# Altium PCB PowerBoard.PcbDoc
Units mm, origin at the board's own origin, x right, y up, seen from the top; angles counter-clockwise.
Board outline 99.8 x 133.8 mm, 4 copper layers (Top Layer, Signal Layer 1, Signal Layer 2, Bottom Layer), stack 1.55 mm thick; 73 components, 18 nets, 363 pads, 774 vias.
Unrouted connection lines stored in the file: 2.
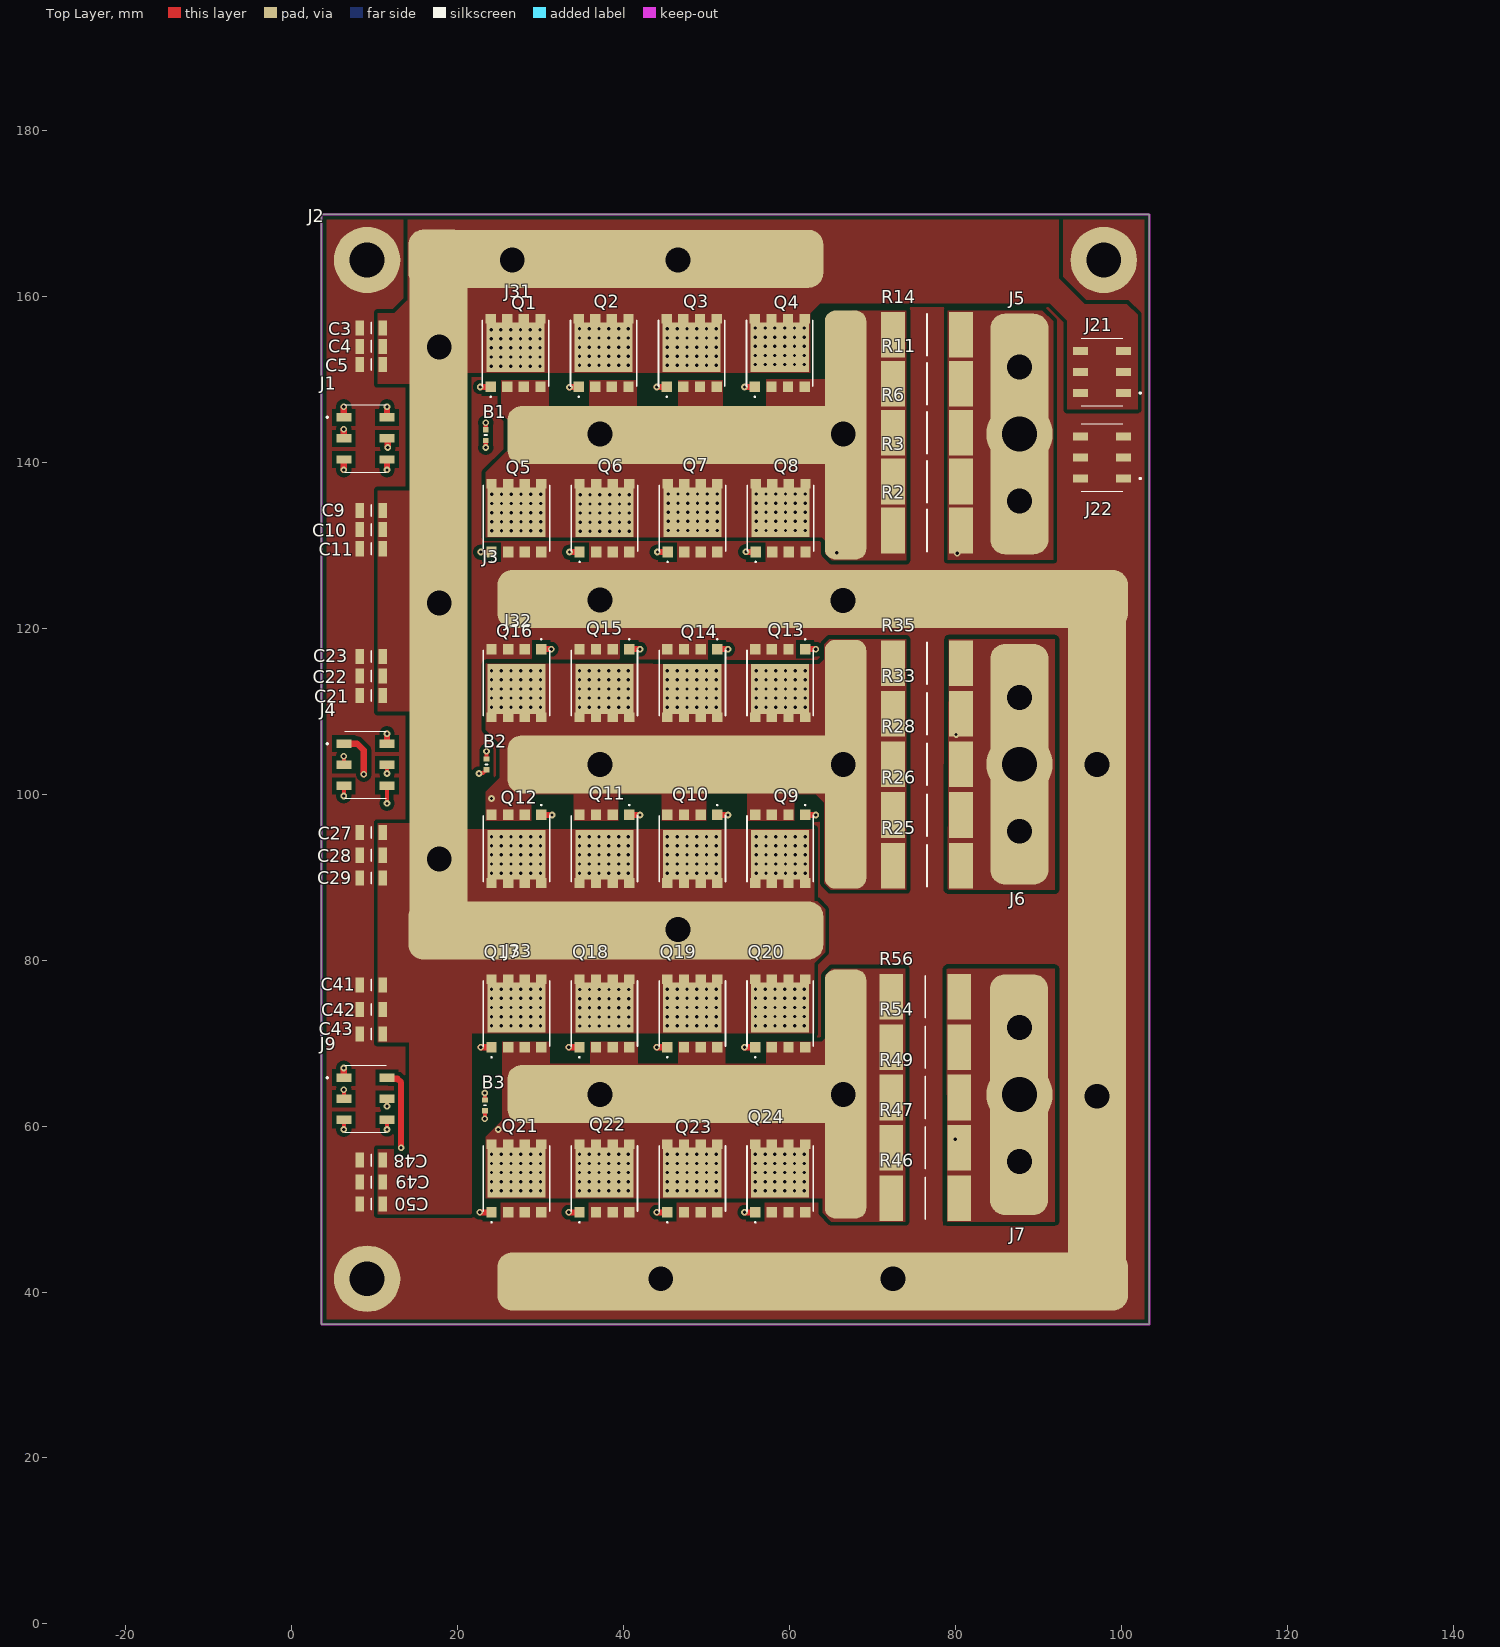
[diagram p0: Top Layer view]
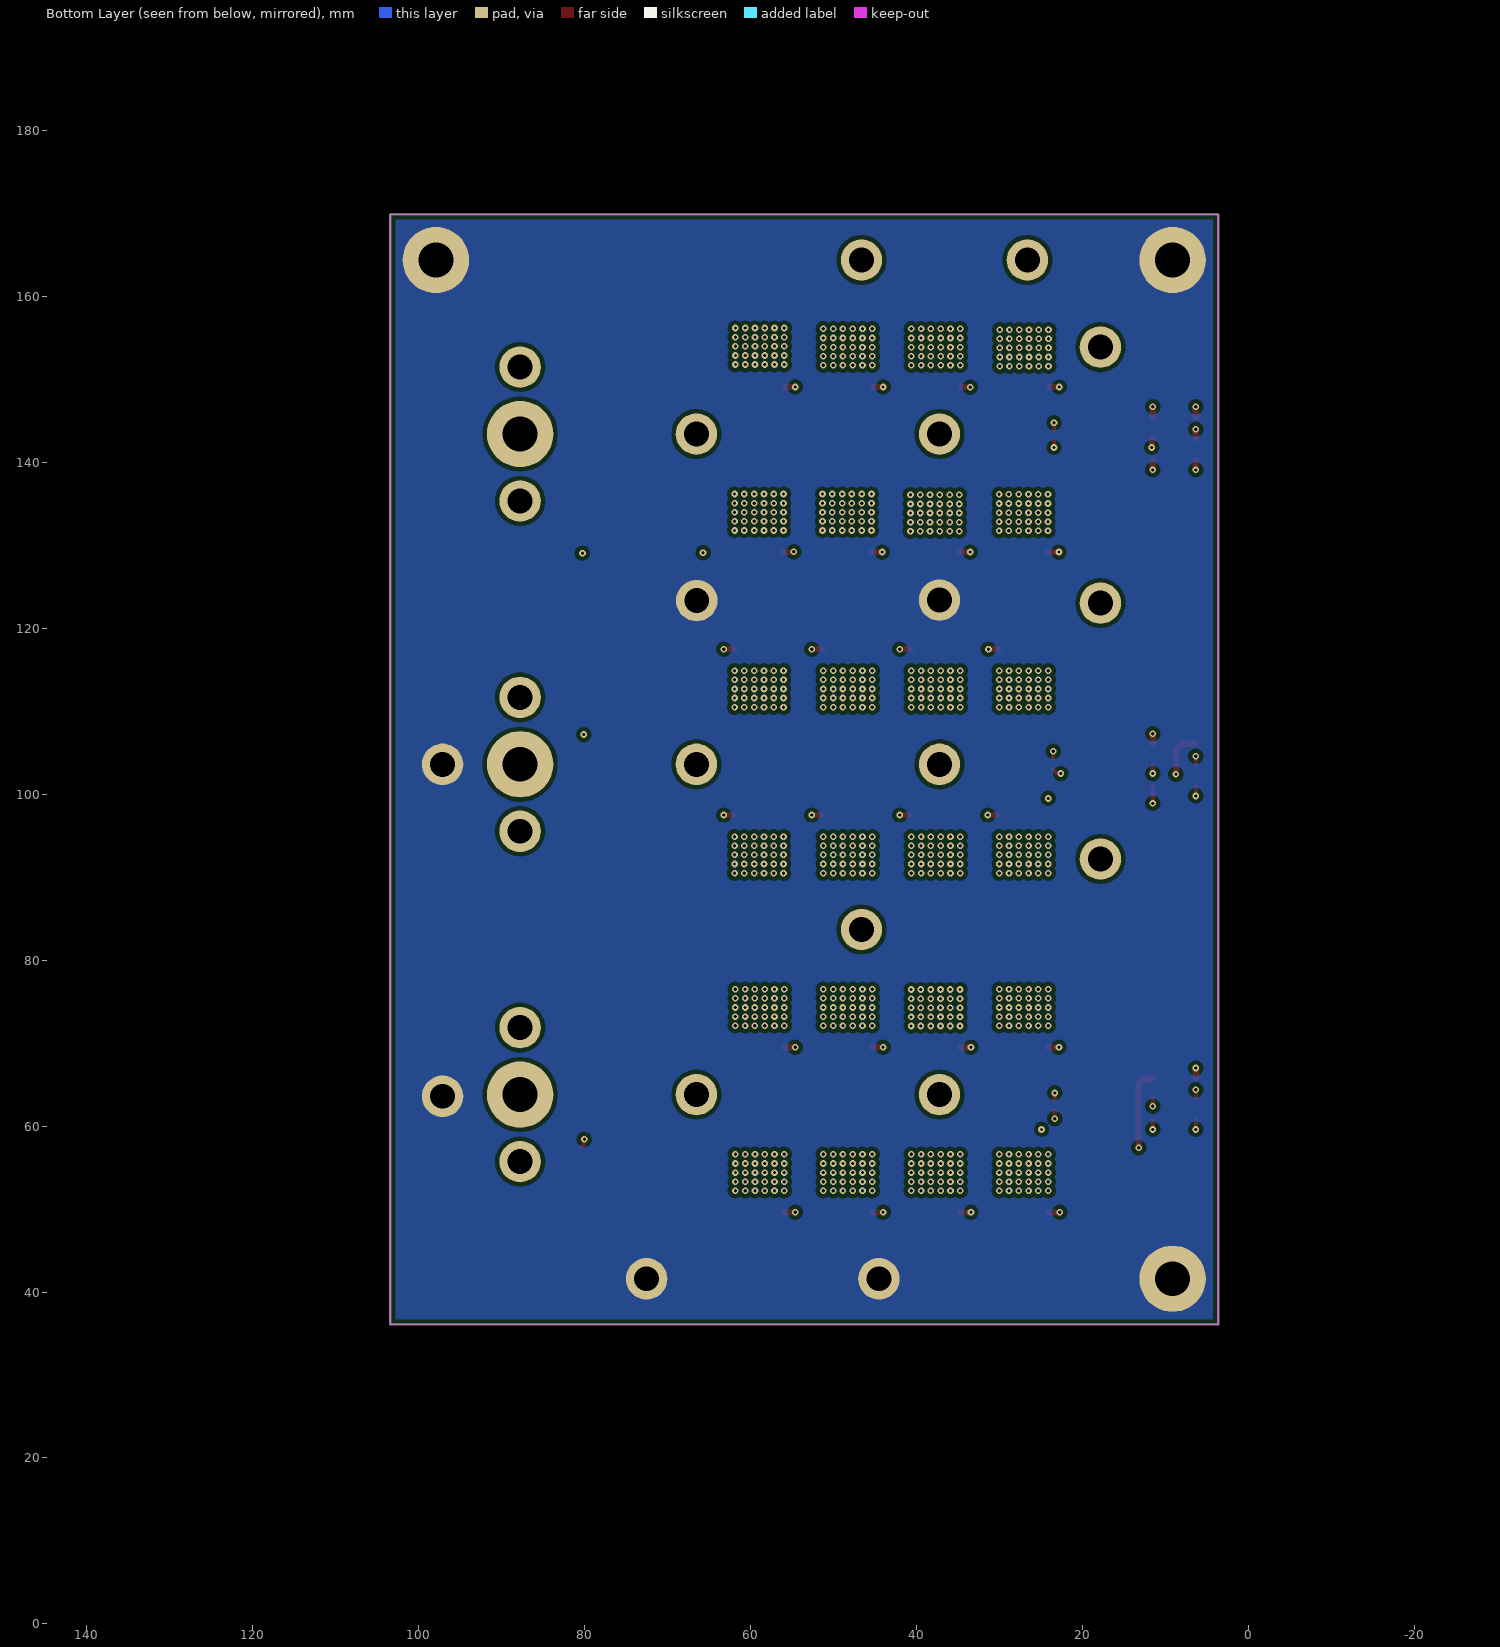
[diagram p1: Bottom Layer view, seen from below]
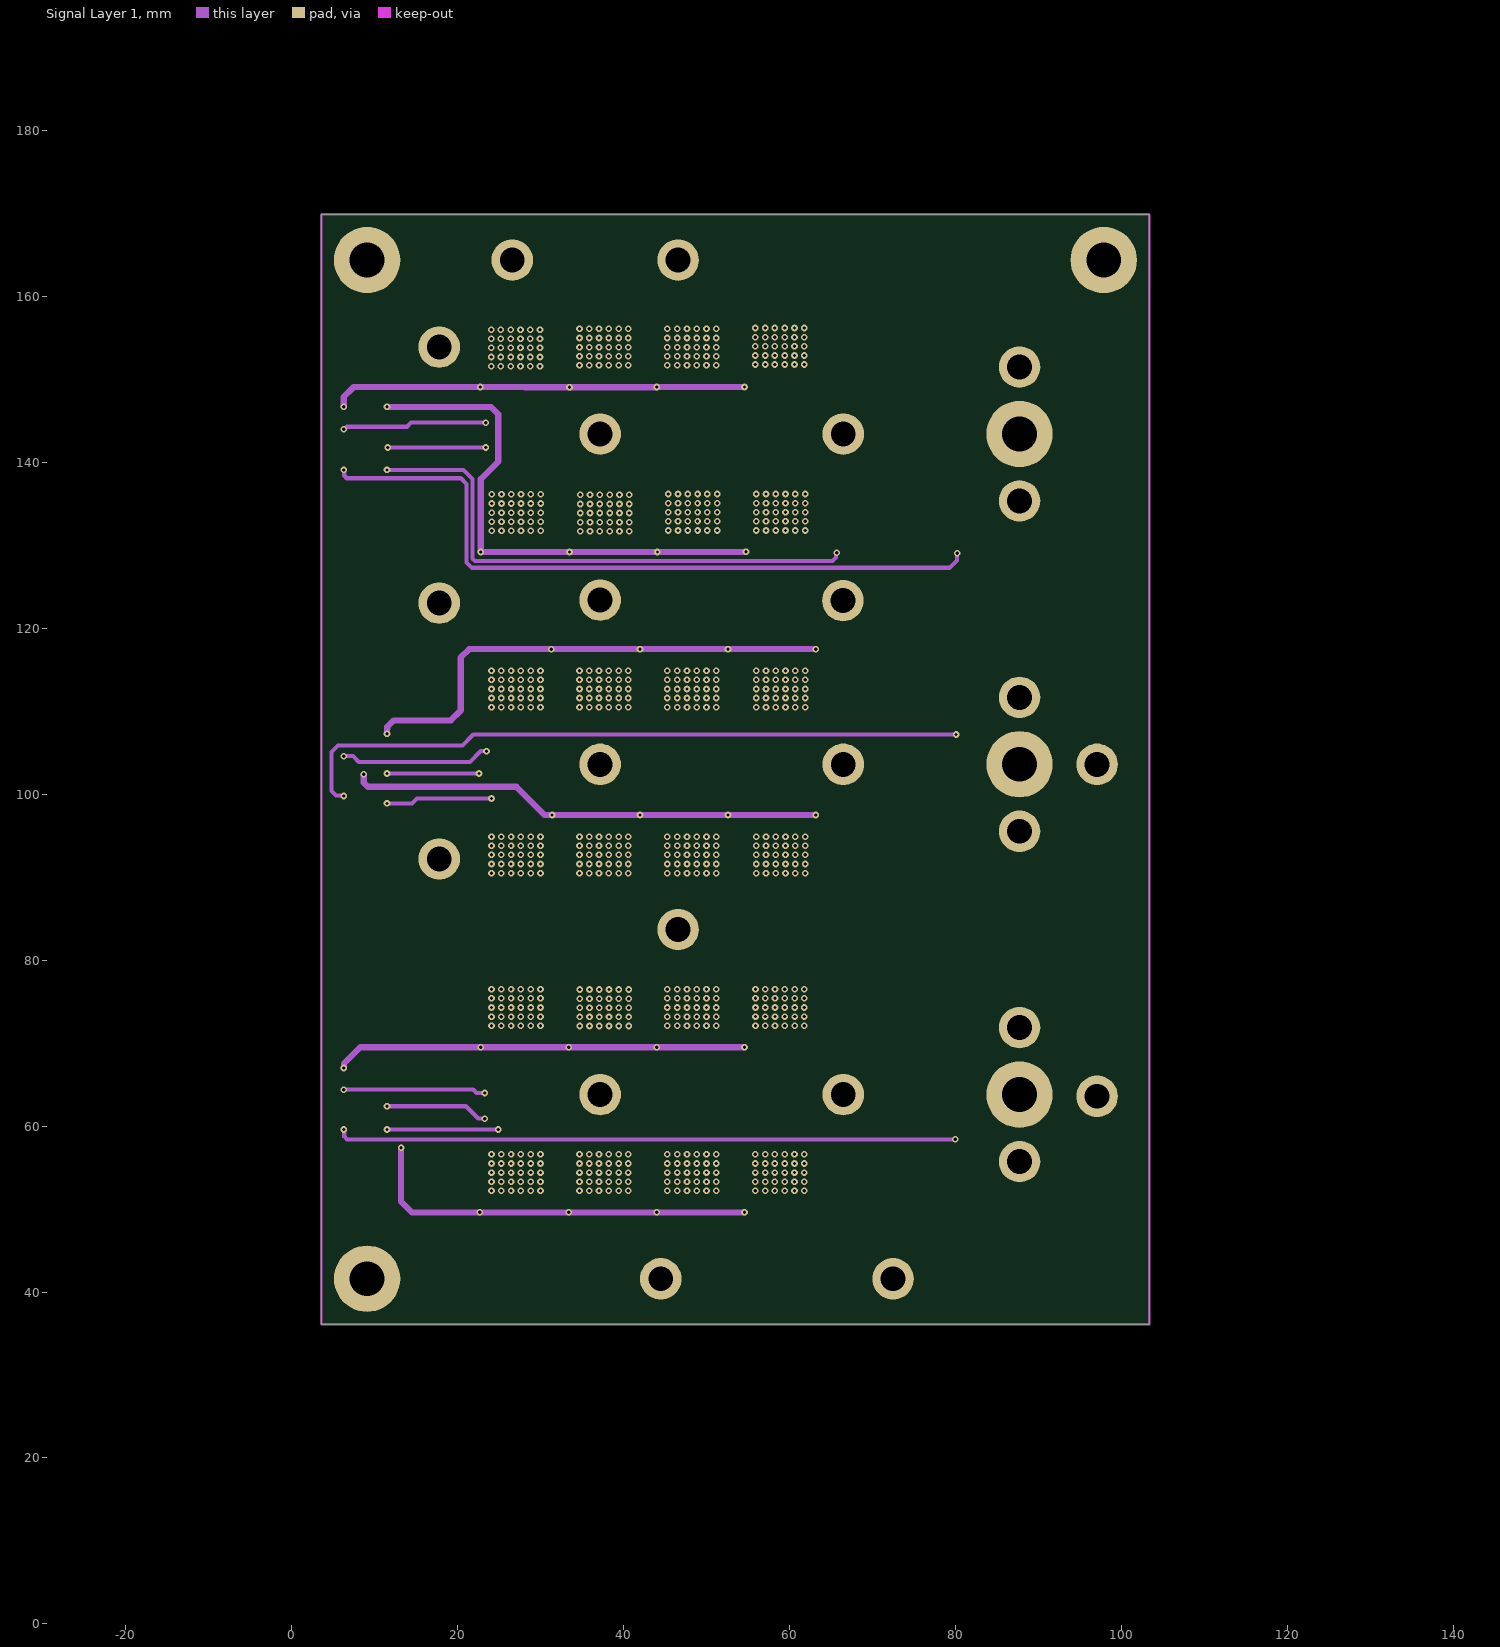
[diagram p2: Signal Layer 1]
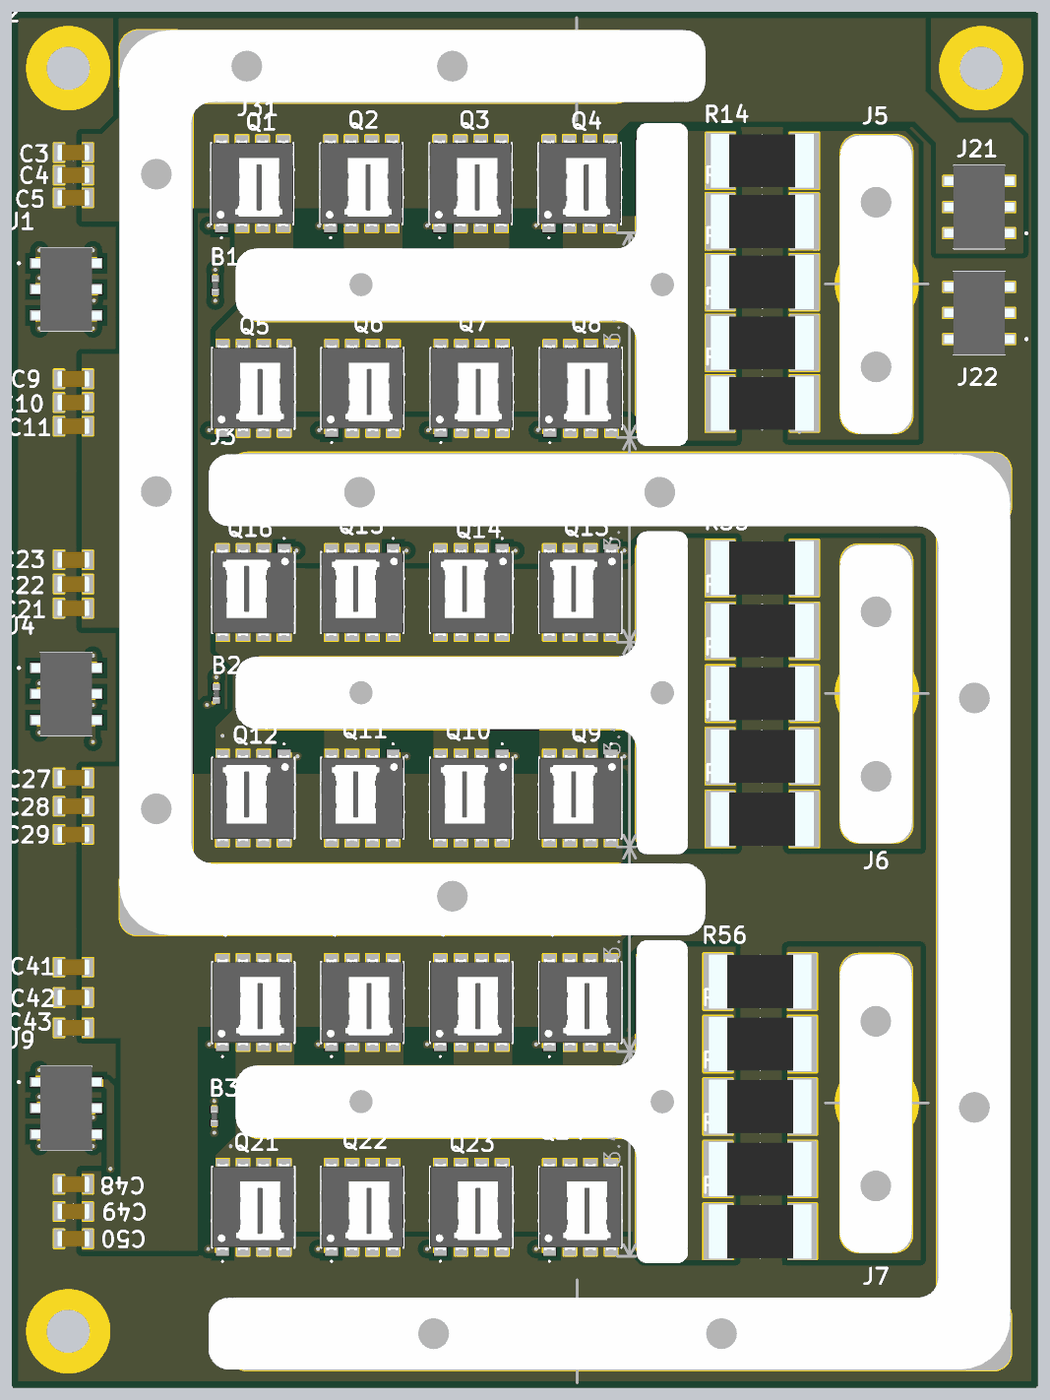
[diagram p3: 3D render of the assembled board from above, using the file's embedded part models]

## Layer stack, top to bottom
Top Solder: solder mask 0.025, Solder Resist, Dk 3.5
Top Layer: signal copper 0.018
Dielectric 2: core 0.254, Dk 4.2
Signal Layer 1: signal copper 0.036
Dielectric 4: core 0.934, Dk 4.2
Signal Layer 2: signal copper 0.036
Dielectric 3: core 0.254, Dk 4.2
Bottom Layer: signal copper 0.018
Bottom Solder: solder mask 0.025, Solder Resist, Dk 3.5

## Board outline
3.6,36.1 3.6,169.9 103.4,169.9 103.4,36.1

## Design rules (kind name [scope] priority, off if disabled: settings)
AssemblyTestPointUsage AssemblyTestPointUsage_1 [All] p2:
AssemblyTestpoint AssemblyTestpoint_1 [All] p1: testpointundercomponent=TRUE minsize=1.016 maxsize=2.54 preferedsize=1.524 minholesize=0 maxholesize=1.016 preferedholesize=0.813 testpointgrid=0.025 usegrid=TRUE gridtolerance=0 allowsidetop=TRUE allowsidebottom=TRUE
Clearance Clearance_1 [All] p1: gap=0.5 ignorepadtopadclearanceinfootprint=FALSE except(0: Arc-Hole Track-Hole SMDPad-Hole THPad-Hole Via-Hole Fill-Hole Poly-Hole Region-Hole Text-Hole; 0.2: Arc-Arc Arc-Track Arc-SMDPad Arc-THPad Arc-Via Track-Track Track-SMDPad Track-THPad Track-Via SMDPad-SMDPad SMDPad-THPad SMDPad-Via THPad-THPad THPad-Via Via-Via)
ComponentClearance ComponentClearance_1 [All] p1: gap=0.2 collisioncheckmode=3 verticalgap=0.2 showdistances=TRUE
DiffPairsRouting DiffPairsRouting_1 [All] p1: maxlimit=0.254 minlimit=0.254 mostfreqgap=0.254 substack1={0391787D-B3DB-4B16-B312-97C439599AB4} toplayer_{0391787d-b3db-4b16-b312-97c439599ab4}_minwidth=0.381 toplayer_{0391787d-b3db-4b16-b312-97c439599ab4}_maxwidth=0.381 toplayer_{0391787d-b3db-4b16-b312-97c439599ab4}_prefwidth=0.381 midlayer1_{0391787d-b3db-4b16-b312-97c439599ab4}_minwidth=0.381 midlayer1_{0391787d-b3db-4b16-b312-97c439599ab4}_maxwidth=0.381 midlayer1_{0391787d-b3db-4b16-b312-97c439599ab4}_prefwidth=0.381 midlayer2_{0391787d-b3db-4b16-b312-97c439599ab4}_minwidth=0.381 midlayer2_{0391787d-b3db-4b16-b312-97c439599ab4}_maxwidth=0.381 midlayer2_{0391787d-b3db-4b16-b312-97c439599ab4}_prefwidth=0.381 bottomlayer_{0391787d-b3db-4b16-b312-97c439599ab4}_minwidth=0.381 bottomlayer_{0391787d-b3db-4b16-b312-97c439599ab4}_maxwidth=0.381 bottomlayer_{0391787d-b3db-4b16-b312-97c439599ab4}_prefwidth=0.381 substack2={0E55BCC6-0461-4BB8-A6DB-68FAAC3CF03A} toplayer_{0e55bcc6-0461-4bb8-a6db-68faac3cf03a}_minwidth=0.381 toplayer_{0e55bcc6-0461-4bb8-a6db-68faac3cf03a}_maxwidth=0.381 toplayer_{0e55bcc6-0461-4bb8-a6db-68faac3cf03a}_prefwidth=0.381 midlayer1_{0e55bcc6-0461-4bb8-a6db-68faac3cf03a}_minwidth=0.381 midlayer1_{0e55bcc6-0461-4bb8-a6db-68faac3cf03a}_maxwidth=0.381 midlayer1_{0e55bcc6-0461-4bb8-a6db-68faac3cf03a}_prefwidth=0.381 midlayer2_{0e55bcc6-0461-4bb8-a6db-68faac3cf03a}_minwidth=0.381 midlayer2_{0e55bcc6-0461-4bb8-a6db-68faac3cf03a}_maxwidth=0.381 midlayer2_{0e55bcc6-0461-4bb8-a6db-68faac3cf03a}_prefwidth=0.381 bottomlayer_{0e55bcc6-0461-4bb8-a6db-68faac3cf03a}_minwidth=0.381 bottomlayer_{0e55bcc6-0461-4bb8-a6db-68faac3cf03a}_maxwidth=0.381 bottomlayer_{0e55bcc6-0461-4bb8-a6db-68faac3cf03a}_prefwidth=0.381 substack3={7F91D735-8F98-4998-8FBE-C2B075826548} toplayer_{7f91d735-8f98-4998-8fbe-c2b075826548}_minwidth=0.381 toplayer_{7f91d735-8f98-4998-8fbe-c2b075826548}_maxwidth=0.381 toplayer_{7f91d735-8f98-4998-8fbe-c2b075826548}_prefwidth=0.381 midlayer1_{7f91d735-8f98-4998-8fbe-c2b075826548}_minwidth=0.381 midlayer1_{7f91d735-8f98-4998-8fbe-c2b075826548}_maxwidth=0.381 midlayer1_{7f91d735-8f98-4998-8fbe-c2b075826548}_prefwidth=0.381 midlayer2_{7f91d735-8f98-4998-8fbe-c2b075826548}_minwidth=0.381 midlayer2_{7f91d735-8f98-4998-8fbe-c2b075826548}_maxwidth=0.381 midlayer2_{7f91d735-8f98-4998-8fbe-c2b075826548}_prefwidth=0.381 bottomlayer_{7f91d735-8f98-4998-8fbe-c2b075826548}_minwidth=0.381 bottomlayer_{7f91d735-8f98-4998-8fbe-c2b075826548}_maxwidth=0.381 bottomlayer_{7f91d735-8f98-4998-8fbe-c2b075826548}_prefwidth=0.381 substack4={4ED4D01E-40BF-4D50-BA5A-F23A5EC9E761} toplayer_{4ed4d01e-40bf-4d50-ba5a-f23a5ec9e761}_minwidth=0.381 toplayer_{4ed4d01e-40bf-4d50-ba5a-f23a5ec9e761}_maxwidth=0.381 toplayer_{4ed4d01e-40bf-4d50-ba5a-f23a5ec9e761}_prefwidth=0.381 midlayer1_{4ed4d01e-40bf-4d50-ba5a-f23a5ec9e761}_minwidth=0.381 midlayer1_{4ed4d01e-40bf-4d50-ba5a-f23a5ec9e761}_maxwidth=0.381 midlayer1_{4ed4d01e-40bf-4d50-ba5a-f23a5ec9e761}_prefwidth=0.381 midlayer2_{4ed4d01e-40bf-4d50-ba5a-f23a5ec9e761}_minwidth=0.381 midlayer2_{4ed4d01e-40bf-4d50-ba5a-f23a5ec9e761}_maxwidth=0.381 midlayer2_{4ed4d01e-40bf-4d50-ba5a-f23a5ec9e761}_prefwidth=0.381 bottomlayer_{4ed4d01e-40bf-4d50-ba5a-f23a5ec9e761}_minwidth=0.381 bottomlayer_{4ed4d01e-40bf-4d50-ba5a-f23a5ec9e761}_maxwidth=0.381 bottomlayer_{4ed4d01e-40bf-4d50-ba5a-f23a5ec9e761}_prefwidth=0.381 substack5={57BA5FAC-A096-47A8-A9C3-28502E285703} toplayer_{57ba5fac-a096-47a8-a9c3-28502e285703}_minwidth=0.381 toplayer_{57ba5fac-a096-47a8-a9c3-28502e285703}_maxwidth=0.381 toplayer_{57ba5fac-a096-47a8-a9c3-28502e285703}_prefwidth=0.381 midlayer1_{57ba5fac-a096-47a8-a9c3-28502e285703}_minwidth=0.381 midlayer1_{57ba5fac-a096-47a8-a9c3-28502e285703}_maxwidth=0.381 midlayer1_{57ba5fac-a096-47a8-a9c3-28502e285703}_prefwidth=0.381 midlayer2_{57ba5fac-a096-47a8-a9c3-28502e285703}_minwidth=0.381 midlayer2_{57ba5fac-a096-47a8-a9c3-28502e285703}_maxwidth=0.381 midlayer2_{57ba5fac-a096-47a8-a9c3-28502e285703}_prefwidth=0.381 bottomlayer_{57ba5fac-a096-47a8-a9c3-28502e285703}_minwidth=0.381 bottomlayer_{57ba5fac-a096-47a8-a9c3-28502e285703}_maxwidth=0.381 bottomlayer_{57ba5fac-a096-47a8-a9c3-28502e285703}_prefwidth=0.381 toplayer_minwidth=0.381 toplayer_maxwidth=0.381 toplayer_prefwidth=0.381 midlayer1_minwidth=0.381 midlayer1_maxwidth=0.381 midlayer1_prefwidth=0.381 midlayer2_minwidth=0.381 midlayer2_maxwidth=0.381 midlayer2_prefwidth=0.381 bottomlayer_minwidth=0.381 bottomlayer_maxwidth=0.381 bottomlayer_prefwidth=0.381 substack6={B351C19E-D50C-4F2F-B5BB-791B69F230FF} toplayer_{b351c19e-d50c-4f2f-b5bb-791b69f230ff}_minwidth=0.381 toplayer_{b351c19e-d50c-4f2f-b5bb-791b69f230ff}_maxwidth=0.381 toplayer_{b351c19e-d50c-4f2f-b5bb-791b69f230ff}_prefwidth=0.381 midlayer1_{b351c19e-d50c-4f2f-b5bb-791b69f230ff}_minwidth=0.381 midlayer1_{b351c19e-d50c-4f2f-b5bb-791b69f230ff}_maxwidth=0.381 midlayer1_{b351c19e-d50c-4f2f-b5bb-791b69f230ff}_prefwidth=0.381 midlayer2_{b351c19e-d50c-4f2f-b5bb-791b69f230ff}_minwidth=0.381 midlayer2_{b351c19e-d50c-4f2f-b5bb-791b69f230ff}_maxwidth=0.381 midlayer2_{b351c19e-d50c-4f2f-b5bb-791b69f230ff}_prefwidth=0.381 bottomlayer_{b351c19e-d50c-4f2f-b5bb-791b69f230ff}_minwidth=0.381 bottomlayer_{b351c19e-d50c-4f2f-b5bb-791b69f230ff}_maxwidth=0.381 bottomlayer_{b351c19e-d50c-4f2f-b5bb-791b69f230ff}_prefwidth=0.381 substack7={2F1B6B62-C7FD-47FC-965D-ED7560D8E9E8} toplayer_{2f1b6b62-c7fd-47fc-965d-ed7560d8e9e8}_minwidth=0.381 toplayer_{2f1b6b62-c7fd-47fc-965d-ed7560d8e9e8}_maxwidth=0.381 toplayer_{2f1b6b62-c7fd-47fc-965d-ed7560d8e9e8}_prefwidth=0.381 midlayer1_{2f1b6b62-c7fd-47fc-965d-ed7560d8e9e8}_minwidth=0.381 midlayer1_{2f1b6b62-c7fd-47fc-965d-ed7560d8e9e8}_maxwidth=0.381 midlayer1_{2f1b6b62-c7fd-47fc-965d-ed7560d8e9e8}_prefwidth=0.381 midlayer2_{2f1b6b62-c7fd-47fc-965d-ed7560d8e9e8}_minwidth=0.381 midlayer2_{2f1b6b62-c7fd-47fc-965d-ed7560d8e9e8}_maxwidth=0.381 midlayer2_{2f1b6b62-c7fd-47fc-965d-ed7560d8e9e8}_prefwidth=0.381 bottomlayer_{2f1b6b62-c7fd-47fc-965d-ed7560d8e9e8}_minwidth=0.381 bottomlayer_{2f1b6b62-c7fd-47fc-965d-ed7560d8e9e8}_maxwidth=0.381 bottomlayer_{2f1b6b62-c7fd-47fc-965d-ed7560d8e9e8}_prefwidth=0.381 substack8={A0CE5E7A-17C9-422A-884C-87F0A86ADDD9} toplayer_{a0ce5e7a-17c9-422a-884c-87f0a86addd9}_minwidth=0.381 toplayer_{a0ce5e7a-17c9-422a-884c-87f0a86addd9}_maxwidth=0.381 toplayer_{a0ce5e7a-17c9-422a-884c-87f0a86addd9}_prefwidth=0.381 midlayer1_{a0ce5e7a-17c9-422a-884c-87f0a86addd9}_minwidth=0.381 midlayer1_{a0ce5e7a-17c9-422a-884c-87f0a86addd9}_maxwidth=0.381 midlayer1_{a0ce5e7a-17c9-422a-884c-87f0a86addd9}_prefwidth=0.381 midlayer2_{a0ce5e7a-17c9-422a-884c-87f0a86addd9}_minwidth=0.381 midlayer2_{a0ce5e7a-17c9-422a-884c-87f0a86addd9}_maxwidth=0.381 midlayer2_{a0ce5e7a-17c9-422a-884c-87f0a86addd9}_prefwidth=0.381 bottomlayer_{a0ce5e7a-17c9-422a-884c-87f0a86addd9}_minwidth=0.381 bottomlayer_{a0ce5e7a-17c9-422a-884c-87f0a86addd9}_maxwidth=0.381 bottomlayer_{a0ce5e7a-17c9-422a-884c-87f0a86addd9}_prefwidth=0.381 maxuncoupledlength=12.7
FabricationTestPointUsage FabricationTestPointUsage_1 [All] p1: valid=0 allowmultiple=FALSE
FabricationTestpoint FabricationTestpoint_1 [All] p1: side=3 testpointundercomponent=TRUE minsize=1.016 maxsize=2.54 preferedsize=1.524 minholesize=0 maxholesize=1.016 preferedholesize=0.813 testpointgrid=0.025 allowsidetop=TRUE allowsidebottom=TRUE usegrid=TRUE gridtolerance=0
FanoutControl Fanout_BGA_1 [IsBGA] p1: bgadir=Out bgaviamode=Centered fanoutstyle=Auto fanoutdirection=Alternating viagrid=0.025 // Fanout_BGA (Default Rule)
FanoutControl Fanout_LCC_1 [IsLCC] p2: bgadir=Out bgaviamode=Centered fanoutstyle=Auto fanoutdirection=Alternating viagrid=0.025 // Fanout_LCC (Default Rule)
FanoutControl Fanout_SOIC_1 [IsSOIC] p3: bgadir=Out bgaviamode=Centered fanoutstyle=Auto fanoutdirection=Alternating viagrid=0.025 // Fanout_SOIC (Default Rule)
FanoutControl Fanout_Small_1 [(CompPinCount < 5)] p4: bgadir=Out bgaviamode=Centered fanoutstyle=Auto fanoutdirection=OutThenIn viagrid=0.025 // Fanout_Small (Default Rule)
FanoutControl Fanout_Default_1 [All] p5: bgadir=Out bgaviamode=Centered fanoutstyle=Auto fanoutdirection=Alternating viagrid=0.025 // Fanout_Default (Default Rule)
Height Height_1 [All] p1: minheight=0 maxheight=25.4 prefheight=12.7
HoleSize HoleSize_1 [All] p1: absolutevalues=TRUE maxlimit=5 minlimit=0.3 maxpercent=80.000 minpercent=20.000
HoleToHoleClearance HoleToHoleClearance_1 [All] p1: gap=0.254 allowstackedmicrovias=TRUE
LayerPairs LayerPairs_1 [All] p1: enforce=TRUE
MinimumSolderMaskSliver MinimumSolderMaskSliver_1 [All] p1: minsoldermaskwidth=0.1
NetAntennae NetAntennae_1 [InNetClass('VIN')] p1: netantennaetolerance=0
PasteMaskExpansion PasteMaskExpansion_1 [All] p1: expansion=0
PlaneClearance PlaneClearance_1 [All] p1: clearance=0.508
PlaneConnect PlaneConnect_1 [All] p1: planeconnectstyle=Relief reliefexpansion=0.508 reliefentries=4 reliefconductorwidth=0.254 reliefairgap=0.254
PolygonConnect PolygonConnect_1 [All] p1: connectstyle=Direct reliefconductorwidth=0.254 reliefentries=4 polygonreliefangle="90 Angle" airgapwidth=0.254
RoomDefinition PowerBoard [InComponentClass('PowerBoard')] p1: confinementstyle=ConfineOut formatcopy=TRUE lockcomponents=FALSE outline 34.1,10.764 57.8,10.764 57.8,16.2 34.1,16.2
RoutingCorners RoutingCorners_1 [All] p1: cornerstyle=45-Degree minsetback=2.54 maxsetback=2.54
RoutingLayers RoutingLayers_1 [All] p1: top layer_v5=TRUE mid layer 1_v5=TRUE mid layer 2_v5=TRUE bottom layer_v5=TRUE
RoutingPriority RoutingPriority_1 [All] p1: routingpriority=0
RoutingTopology RoutingTopology_1 [All] p1: topology=Shortest
RoutingVias RoutingVias_1 [All] p1: holewidth=0.4 width=0.8 viastyle="Through Hole" minholewidth=0.3 minwidth=0.6 maxholewidth=5 maxwidth=10
ShortCircuit ShortCircuit_1 [All] p1: allowed=FALSE
SilkToBoardRegionClearance SilkToBoardRegionClearance_1 [All] p2:
SilkToSilkClearance SilkToSilkClearance_1 [All] p1: silktosilkclearance=0
SilkToSolderMaskClearance SilkToSolderMaskClearance_1 [IsPad] p1: minsilkscreentomaskgap=0 clearancetoexposedcopper=TRUE
SolderMaskExpansion SolderMaskExpansion_1 [All] p1: expansion=0.102 istentingtop=FALSE
UnRoutedNet UnRoutedNet_1 [All] p1:
UnpouredPolygon UnpouredPolygon_1 [All] p1:
Width Width_1 [All] p1: maxlimit=3.048 minlimit=0.2 preferedwidth=0.254 substack1={0391787D-B3DB-4B16-B312-97C439599AB4} substack2={0E55BCC6-0461-4BB8-A6DB-68FAAC3CF03A} substack3={7F91D735-8F98-4998-8FBE-C2B075826548} substack4={4ED4D01E-40BF-4D50-BA5A-F23A5EC9E761} substack5={57BA5FAC-A096-47A8-A9C3-28502E285703} substack6={B351C19E-D50C-4F2F-B5BB-791B69F230FF} substack7={2F1B6B62-C7FD-47FC-965D-ED7560D8E9E8} substack8={A0CE5E7A-17C9-422A-884C-87F0A86ADDD9}
2 further rules are at their usual default settings.

## Classes and differential pairs
component class Controller: C3 C4 C5 C9 C10 C11 C43 C48 C49 J2 R2 R3 R6 R11 R14
component class Driver: C21 C22 C23 C27 C28 C29 C41 C42 R25 R26 R28 R33 R35 R46 R47 R49

## Components (designator, comment, footprint, x,y, rotation, side; value= is the part's Value field where it differs from the comment)
B1 "NTCS0402E3103GL1T" THRMC1005X65N 23.4,143.3 r270 top
B2 "NTCS0402E3103GL1T" THRMC1005X65N 23.5,103.6 r270 top
B3 "NTCS0402E3103GL1T" THRMC1005X65N 23.3,62.5 r270 top
C3 "2.2uF 100V" CAPC3216X178N 9.6,156.2 r0 top value="100uF 25V"
C4 "2.2uF 100V" CAPC3216X178N 9.6,154 r0 top value=2.2uF
C5 "2.2uF 100V" CAPC3216X178N 9.6,151.8 r0 top value=2.2uF
C9 "2.2uF 100V" CAPC3216X178N 9.6,134.2 r180 top value=2.2uF
C10 "2.2uF 100V" CAPC3216X178N 9.6,131.9 r180 top value=2.2uF
C11 "2.2uF 100V" CAPC3216X178N 9.6,129.6 r180 top value=2.2uF
C21 "2.2uF 100V" CAPC3216X178N 9.6,111.9 r0 top value=4.7uF
C22 "2.2uF 100V" CAPC3216X178N 9.6,114.25 r0 top value=100nF
C23 "2.2uF 100V" CAPC3216X178N 9.6,116.6 r0 top value=100nF
C27 "2.2uF 100V" CAPC3216X178N 9.6,95.4 r180 top value=100nF
C28 "2.2uF 100V" CAPC3216X178N 9.6,92.65 r180 top value=100nF
C29 "2.2uF 100V" CAPC3216X178N 9.6,89.9 r180 top value=100nF
C41 "2.2uF 100V" CAPC3216X178N 9.6,77 r0 top value=4.7uF
C42 "2.2uF 100V" CAPC3216X178N 9.6,74.05 r0 top value=100nF
C43 "2.2uF 100V" CAPC3216X178N 9.6,71.1 r0 top value="220uF 100V"
C48 "2.2uF 100V" CAPC3216X178N 9.6,55.9 r180 top value="220uF 100V"
C49 "2.2uF 100V" CAPC3216X178N 9.6,53.25 r180 top value="220uF 100V"
C50 "2.2uF 100V" CAPC3216X178N 9.6,50.6 r180 top
J1 "PHASE_U" 61030621821 8.9,142.9 r270 top value=61030621821
J2 "74651194R" COPPER_CON1 17.7,124.1 r0 top
J3 "74651194R" COPPER_CON2 97.227,81.929 r0 top
J4 "PHASE_V" 61030621821 8.9,103.56 r270 top value=61030621821
J5 "74651194R" COPPER_CON3 87.6,144 r180 top
J6 "74651194R" COPPER_CON3 87.6,104.186 r180 top
J7 "74651194R" COPPER_CON3 87.573,64.371 r180 top
J9 "PHASE_W" 61030621821 8.9,63.3 r270 top value=61030621821
J21 "VIN+" 61030621821 97.7,150.9 r90 top value=61030621821
J22 "VIN-" 61030621821 97.7,140.6 r90 top value=61030621821
J31 "" COPPER_BUS 47.536,143.3 r0 top value=74651194R
J32 "" COPPER_BUS 47.536,103.615 r0 top value=74651194R
J33 "" COPPER_BUS 47.536,63.865 r0 top value=74651194R
Q1 "NTMSC002N10MCTXG" NTMSC002N10MCTXG 27,154.02 r90 top
Q2 "NTMSC002N10MCTXG" NTMSC002N10MCTXG 37.614,154.02 r90 top
Q3 "NTMSC002N10MCTXG" NTMSC002N10MCTXG 48.229,154.02 r90 top
Q4 "NTMSC002N10MCTXG" NTMSC002N10MCTXG 58.843,154.02 r90 top
Q5 "NTMSC002N10MCTXG" NTMSC002N10MCTXG 27.1,134.115 r90 top
Q6 "NTMSC002N10MCTXG" NTMSC002N10MCTXG 37.714,134.115 r90 top
Q7 "NTMSC002N10MCTXG" NTMSC002N10MCTXG 48.329,134.115 r90 top
Q8 "NTMSC002N10MCTXG" NTMSC002N10MCTXG 58.943,134.115 r90 top
Q9 "NTMSC002N10MCTXG" NTMSC002N10MCTXG 58.9,92.6 r270 top
Q10 "NTMSC002N10MCTXG" NTMSC002N10MCTXG 48.3,92.6 r270 top
Q11 "NTMSC002N10MCTXG" NTMSC002N10MCTXG 37.7,92.6 r270 top
Q12 "NTMSC002N10MCTXG" NTMSC002N10MCTXG 27.1,92.6 r270 top
Q13 "NTMSC002N10MCTXG" NTMSC002N10MCTXG 58.9,112.58 r270 top
Q14 "NTMSC002N10MCTXG" NTMSC002N10MCTXG 48.3,112.58 r270 top
Q15 "NTMSC002N10MCTXG" NTMSC002N10MCTXG 37.7,112.58 r270 top
Q16 "NTMSC002N10MCTXG" NTMSC002N10MCTXG 27.1,112.58 r270 top
Q17 "NTMSC002N10MCTXG" NTMSC002N10MCTXG 27.1,74.415 r90 top
Q18 "NTMSC002N10MCTXG" NTMSC002N10MCTXG 37.7,74.415 r90 top
Q19 "NTMSC002N10MCTXG" NTMSC002N10MCTXG 48.3,74.415 r90 top
Q20 "NTMSC002N10MCTXG" NTMSC002N10MCTXG 58.9,74.415 r90 top
Q21 "NTMSC002N10MCTXG" NTMSC002N10MCTXG 27.1,54.515 r90 top
Q22 "NTMSC002N10MCTXG" NTMSC002N10MCTXG 37.7,54.515 r90 top
Q23 "NTMSC002N10MCTXG" NTMSC002N10MCTXG 48.3,54.515 r90 top
Q24 "NTMSC002N10MCTXG" NTMSC002N10MCTXG 58.9,54.515 r90 top
R2 "0.5mR/9W" RESC10052X137N 76.6,131.8 r180 top value=1k
R3 "0.5mR/9W" RESC10052X137N 76.6,137.7 r180 top value=1k
R6 "0.5mR/9W" RESC10052X137N 76.6,143.6 r180 top value=39k
R11 "0.5mR/9W" RESC10052X137N 76.6,149.5 r180 top value=2.2k
R14 "0.5mR/9W" RESC10052X137N 76.6,155.4 r180 top value=10k
R25 "0.5mR/9W" RESC10052X137N 76.6,91.4 r180 top value=20R
R26 "0.5mR/9W" RESC10052X137N 76.6,97.5 r180 top value=4.7R
R28 "0.5mR/9W" RESC10052X137N 76.6,103.6 r180 top value=4.7R
R33 "0.5mR/9W" RESC10052X137N 76.6,109.7 r180 top value=20R
R35 "0.5mR/9W" RESC10052X137N 76.6,115.8 r180 top value=20R
R46 "0.5mR/9W" RESC10052X137N 76.4,51.3 r180 top value=20R
R47 "0.5mR/9W" RESC10052X137N 76.4,57.375 r180 top value=20R
R49 "0.5mR/9W" RESC10052X137N 76.4,63.45 r180 top value=20R
R54 "0.5mR/9W" RESC10052X137N 76.4,69.525 r180 top value="0.5ohm 9W"
R56 "0.5mR/9W" RESC10052X137N 76.4,75.6 r180 top value="0.5ohm 9W"

## Footprints (in the part's own frame and the unit in brackets; to place one, negate y for a bottom-side part, rotate by r counter-clockwise, add the part's x,y. Pads: shape width x height; smd on the part's side, far side on the other; paste and mask are expansions set on the pad)
61030621821 [mm]
  rect 1x1.8 smd: 1(-2.54,-2.6) 2(-2.54,2.6) 3(0,-2.6) 4(0,2.6) 5(2.54,-2.6) 6(2.54,2.6)
  silkscreen extent -4.06,-4.7 4.06,2.5, body extent -4.06,-3.4 4.06,3.4, height 7.85
CAPC3216X178N [mm]
  rect 1.02x1.82 smd: 1(-1.4,0) 2(1.4,0)
  silkscreen extent 0,-0.7 0,0.7, body extent -1.6,-0.8 1.6,0.8, height 1.78
COPPER_BUS [mm]
  rrect50% 43.2x7 smd: 1(0.064,0)
  rrect50% 5x30 smd: 1(19.241,0)
  body extent -22.16,-15.64 21.84,15.76, height 5
COPPER_CON1 [mm]
  rrect50% 7x88 smd: 1(0,0)
  rrect50% 50x7 smd: 1(21.399,-40.513) 1(21.399,40.45)
  body extent -3.63,-44 53.37,44, height 15
COPPER_CON2 [mm]
  rrect50% 76x7 smd: 1(-34.417,-40.64) 1(-34.417,41.593)
  rrect50% 7x89 smd: 1(-0.127,0.572)
  body extent -74.49,-44.06 3.51,44.94, height 15
COPPER_CON3 [mm]
  rrect50% 7x29 smd: 1(-0.127,0.572)
  body extent -3.57,-13.86 3.43,15.13, height 15
NTMSC002N10MCTXG [mm]
  rect 6x7 smd: DRAIN(-0.12,0)
  rect 1.15x1.25 smd: DRAIN(3.295,-3) DRAIN(3.295,-1) DRAIN(3.295,1) DRAIN(3.295,3)
  rect 1.28x1.25 smd: GATE(-4.915,3) SOURCE(-4.915,-3) SOURCE(-4.915,-1) SOURCE(-4.915,1)
  silkscreen extent -6.16,-4 3.11,4, body extent -5.03,-4.15 3.37,4.15, height 1.02
RESC10052X137N [mm] "RESISTOR SMD 0603"
  rect 2.85x5.5 smd: 1(-4.1,0) 2(4.1,0)
  silkscreen extent 0,-2.52 0,2.52, body extent -5,-2.63 5,2.63, height 1.37
THRMC1005X65N [mm]
  rect 0.65x0.7 smd: 1(-0.65,0) 2(0.65,0)
  silkscreen extent 0,-0.15 0,0.15, body extent -0.5,-0.25 0.5,0.25, height 0.65

## Part data
B1 B2 B3: "NTC Thermistors 10Kohms 2% AEC-Q200", Manufacturer=Vishay, Supplier Part Number=594-NTCS402E3103GL1T, Manufacturer Part Number=NTCS0402E3103GL1T, Price=0.47, Supplier=Mouser
C3: library part "100uF ± 10% 25V", "100uF ± 10% 25V", Manufacturer=Kemet, Manufacturer Part Number=ESK107M025AE3AA, Supplier Part Number=80-ESK107M025AE3AA, Price=0.25, Supplier=mouser
C4 C5 C9 C10 C11: library part "2.2uF ± 10% 50V", "2.2uF ± 10% 50V", Manufacturer=Yageo, Manufacturer Part Number=GRM188R61H225ME11J, Supplier Part Number=81-GRM188R61H225ME1J, Price=0.3, Supplier=mouser
C21 C41: library part "4.7uF ± 10% 50V", "4.7uF ± 10% 50V", Manufacturer=Yageo, Manufacturer Part Number=GRM188R61H225ME11J, Supplier Part Number=81-GRM188R61H225ME1J, Price=0.3, Supplier=mouser
C22 C23 C27 C28 C29 C42: library part "100nF ± 10% 50V", "100nF ± 10% 50V", Manufacturer=Yageo, Manufacturer Part Number=CS0603KRX7R9BB104, Supplier Part Number=603-CS0603KRX79BB104, Price=0.1, Supplier=mouser
C43 C48 C49: library part "220uF 100V", "Aluminum Electrolytic Capacitors - Radial Leaded Al Lytic Cap 85C Radial M Series", Manufacturer=Panasonic, Manufacturer Part Number=ECA-2AM221B, Supplier Part Number=667-ECA-2AM221B, Price=1, Suplier=Mouser
C50: library part "2.2uF ±10% 100V", "Multilayer Ceramic Capacitors MLCC - SMD/SMT 100V 2.2uF X7R 1206 20%TOL HIGH CV", Manufacturer="KYOCERA AVX", Manufacturer Part Number=12061C225MAT2A, Supplier Part Number=581-12061C225MAT2A, Price=0.5, Supplier=Mouser
J1 J4 J9 J21 J22: library part "Female Header 6 Pin_1", "Headers & Wire Housings WERI Header 2,54 mm SMT", Manufacturer="Wurth Elektronik", Manufacturer Part Number=61030621821, Supplier Part Number=710-61030621821, Price=1.8, Supplier=Mouser
J2: library part 6437288-6, "Header vert 26 way 4 row Tab Superseal", Manufacturer="TE Connectivity", Supplier Part Number=571-6437288-6, Manufacturer Part Number=6437288-6, Price=2, Supplier=Mouser, Vlaue=6437288-6
J3: library part CopperCon2, "WP-THRSH REDCUBE THR with external thread, M4 x 5mm, 85A", Manufacturer="Wurth Elektronik", Operating Temperature Max=150°C, Operating Temperature Min=-55°C, Rated Current=85A, Supplier Part Number=710-74651195R, Category="REDCUBE THR", ComponentLink1Description="Website Link", ComponentLink1URL=https://www.we-online.com/redexpert/article/74651194R?ad, ComponentLink2Description="Datasheet Link", ComponentLink2URL=https://www.we-online.com/redexpert/spec/74651194R?ad, Height=8.5mm, Length=10mm, Manufacturer Part Number=74651194R, Match Code=WP-THRSH, Material=Brass, Mount="Through Hole Reflow", Number of Pins=9, Packaging="Tape and Reel", Price=3.5, Supplier=Mouser, Surface=Tin, Thread Length=5mm, Thread Size=M4, Width=10mm
J5 J6 J7: library part CopperCon3, "WP-THRSH REDCUBE THR with external thread, M4 x 5mm, 85A", Manufacturer="Wurth Elektronik", Operating Temperature Max=150°C, Operating Temperature Min=-55°C, Rated Current=85A, Supplier Part Number=710-74651195R, Category="REDCUBE THR", ComponentLink1Description="Website Link", ComponentLink1URL=https://www.we-online.com/redexpert/article/74651194R?ad, ComponentLink2Description="Datasheet Link", ComponentLink2URL=https://www.we-online.com/redexpert/spec/74651194R?ad, Height=8.5mm, Length=10mm, Manufacturer Part Number=74651194R, Match Code=WP-THRSH, Material=Brass, Mount="Through Hole Reflow", Number of Pins=9, Packaging="Tape and Reel", Price=3.5, Supplier=Mouser, Surface=Tin, Thread Length=5mm, Thread Size=M4, Width=10mm
J31 J32 J33: library part CopperBus, "WP-THRSH REDCUBE THR with external thread, M4 x 5mm, 85A", Manufacturer="Wurth Elektronik", Manufacturer Part Number=74651194R, Operating Temperature Max=150°C, Operating Temperature Min=-55°C, Rated Current=85A, Supplier Part Number=710-74651195R, Category="REDCUBE THR", ComponentLink1Description="Website Link", ComponentLink1URL=https://www.we-online.com/redexpert/article/74651194R?ad, ComponentLink2Description="Datasheet Link", ComponentLink2URL=https://www.we-online.com/redexpert/spec/74651194R?ad, Height=8.5mm, Length=10mm, Match Code=WP-THRSH, Material=Brass, Mount="Through Hole Reflow", Number of Pins=9, Packaging="Tape and Reel", Price=3.5, Supplier=Mouser, Surface=Tin, Thread Length=5mm, Thread Size=M4, Width=10mm
Q1 Q2 Q3 Q4 Q5 Q6 Q7 Q8 Q9 Q10 Q11 Q12 Q13 Q14 Q15 Q16 Q17 Q18 Q19 Q20 Q21 Q22 Q23 Q24: "MOSFET Single N-Channel Power MOSFET 100V, 236A, 2.0mohm", Manufacturer=Onsemi, Manufacturer Part Number=NTMTSC002N10MCTXG, Supplier Part Number=863-TMTSC002N10MCTXG, Price=5.9, Supplier=Mouser
R2 R3: library part "1 kOhms ±1% 0.1W", "1 kOhms ±1% 0.1W", Manufacturer=Yageo, Manufacturer Part Number=RC0603FR-071KL, Supplier Part Number=603-RC0603FR-071KL, Price=0.1, Supplier=Mouser
R6: library part "39 kOhms ±1% 0.8W", "39 kOhms ±1% 0.8W", Manufacturer=Yageo, Manufacturer Part Number=RT0805FRE0739KL, Supplier Part Number=603-RT0805FRE0739KL, Price=0.1, Supplier=mouser
R11: library part "2.2 kOhms ±1% 0.8W", "2.2 kOhms ±1% 0.8W", Manufacturer=Yageo, Manufacturer Part Number=RT0805FRE072K2L, Supplier Part Number=603-RT0805FRE072K2L, Price=0.1, Supplier=mouser
R14: library part "10 kOhms ±1% 0.1W", "10 kOhms ±1% 0.1W", Manufacturer=Yageo, Manufacturer Part Number=RC0603FR-0710KL, Supplier Part Number=603-RC0603FR-0710KL, Price=0.1, Supplier=mouser
R25 R49: library part "20 ohm 0.25W ±1%", "20 ohm 0.25W ±1%", Manufacturer=Yageo, Manufacturer Part Number=RC1206FR-0720RL, Supplier Part Number=603-RC1206FR-0720RL, Price=0.12, Supplier=Mouser
R26 R28: library part "4.7 ohm 0.25W ±1%", "4.7 ohm 0.25W ±1%", Manufacturer=Yageo, Manufacturer Part Number=RC1206FR-074R7L, Supplier Part Number=603-RC1206FR-074R7L, Price=0.12, Supplier=Mouser
R33 R35 R46 R47: library part "20ohm 0.25W ±1%", "20 ohm 0.25W ±1%", Manufacturer=Yageo, Manufacturer Part Number=RC1206FR-0720RL, Supplier Part Number=603-RC1206FR-0720RL, Price=0.12, Supplier=Mouser
R54 R56: library part CSS2H-3920R-L500FE, "Current Sense Resistors - SMD 0.5mOHMS 9W 1% AEC-Q200", Manufacturer=Bourns, Supplier Part Number=652-CSS2H3920RL500FE, Manufacturer Part Number=CSS2H-3920R-L500FE, Price=2, Supplier=Mouser

## Free pads (board coordinates)
  round 8 hole 4.2: 3(9.1,41.6) 3(9.1,164.4) 3(87.75,63.8) 3(87.75,103.614) 3(87.75,143.428) 3(97.9,164.4)
  round 5 hole 3: 3(17.8,92.2) 3(17.8,123.05) 3(17.8,153.9) 3(26.6,164.4) 3(37.2,63.8) 3(37.2,103.614) 3(37.2,123.4) 3(37.2,143.428) 3(44.5,41.6) 3(46.6,83.7) 3(46.6,164.4) 3(66.46,123.349) 3(66.5,63.8) 3(66.5,103.614) 3(66.5,143.428) 3(72.5,41.6) 3(87.75,55.728) 3(87.75,71.871) 3(87.75,95.543) 3(87.75,111.686) 3(87.75,135.357) 3(87.75,151.5) 3(97.1,63.6) 3(97.1,103.614)

## Via types
v1: diameter 0.8, hole 0.4, Top Layer to Bottom Layer, tented both sides, 774 vias

## Nets (pads, with @x,y where several pads share a name; then routed paths per layer and width w, separated by ;. In a path a pad name is that pad's centre, name@x,y a point inside that pad or via, vN(x,y) a via of type N, cw(c..) or ccw(c..) an arc to the next point about the centre after c; other vN are vias at no path point)
+3V3: B1.1 B2.1 B3.1 J1.3 J4.3 J9.3 | length 58.5
  Top Layer w0.5: J9.3 v1(6.3,64.4) ; J4.3 v1(6.3,104.6) ; B3.1 v1(23.3,64) ; B1.1 v1(23.4,144.8) ; B2.1 v1(23.5,105.2)
  Top Layer w0.75: J1.3 v1(6.3,144)
  Signal Layer 1 w0.5: v1(6.3,64.4) 21.9,64.4 22.287,64.013 23.287,64.013 v1(23.3,64) ; v1(6.3,104.6) 7.4,104.6 8.1,103.9 21.5,103.9 22.8,105.2 v1(23.5,105.2) ; v1(6.3,144) 6.381,144 6.681,144.3 13.9,144.3 14.4,144.8 v1(23.4,144.8)
GND: C3.1 C4.1 C5.1 C9.2 C10.2 C11.2 C21.1 C22.1 C23.1 C27.2 C28.2 C29.2 C41.1 C42.1 C43.1 C48.2 C49.2 C50.2 J3.1 J22.1 J22.2 J22.3 J22.4 J22.5 J22.6 pad.3@9.1,41.6 pad.3@9.1,164.4 pad.3@37.2,123.4 pad.3@44.5,41.6 pad.3@66.46,123.349 pad.3@72.5,41.6 pad.3@97.1,63.6 pad.3@97.1,103.614 pad.3@97.9,164.4 Q5.SOURCE Q6.SOURCE Q7.SOURCE Q8.SOURCE Q13.SOURCE Q14.SOURCE Q15.SOURCE Q16.SOURCE Q21.SOURCE Q22.SOURCE Q23.SOURCE Q24.SOURCE
OUT_U: J1.5 J5.1 pad.3@87.75,135.357 pad.3@87.75,143.428 pad.3@87.75,151.5 R2.1 R3.1 R6.1 R11.1 R14.1 | length 87.1
  Top Layer w0.75: v1(6.3,139.1) J1.5
  Signal Layer 1 w0.5: v1(6.3,139.1) 6.357,139.043 6.357,138.393 6.65,138.1 20.4,138.1 21.1,137.4 21.1,127.955 21.755,127.3 79.3,127.3 80.2,128.2 v1@80.2,129
  other v1: 80.24,129.048
OUT_V: J4.5 J6.1 pad.3@87.75,95.543 pad.3@87.75,103.614 pad.3@87.75,111.686 R25.1 R26.1 R28.1 R33.1 R35.1 | length 83.8
  Top Layer w0.5: v1(6.3,99.8) J4.5
  Signal Layer 1 w0.5: v1(6.3,99.8) 6.243,99.857 5.343,99.857 4.8,100.4 4.8,105.1 5.6,105.9 20.6,105.9 21.9,107.2 v1(80.1,107.2)
OUT_W: J7.1 J9.5 pad.3@87.75,55.728 pad.3@87.75,63.8 pad.3@87.75,71.871 R46.1 R47.1 R49.1 R54.1 R56.1 | length 77.1
  Top Layer w0.5: v1(6.3,59.6) J9.5 ; v1(80,58.4) 80,57.875 R47.1
  Signal Layer 1 w0.5: v1(6.3,59.6) 6.357,59.543 6.357,58.743 6.7,58.4 v1(80,58.4)
PHASE_U: J1.6 J31.1 pad.3@37.2,143.428 pad.3@66.5,143.428 Q1.SOURCE Q2.SOURCE Q3.SOURCE Q4.SOURCE Q5.DRAIN Q6.DRAIN Q7.DRAIN Q8.DRAIN R2.2 R3.2 R6.2 R11.2 R14.2 | length 66.4
  Top Layer w0.75: v1(11.5,139.1) J1.6
  Signal Layer 1 w0.5: v1(11.5,139.1) 20.7,139.1 21.8,138 21.8,128.393 22.093,128.1 65.2,128.1 65.643,128.543 65.643,129.043 v1(65.7,129.1)
  other v1: 34.8,131.7 35.98,131.7 37.16,131.7 38.34,131.7 39.52,131.7 40.7,131.7 24.117,131.754 25.297,131.754 26.477,131.754 27.657,131.754 28.837,131.754 30.017,131.754 45.4,131.8 46.58,131.8 47.76,131.8 48.94,131.8 50.12,131.8 51.3,131.8 56,131.8 57.18,131.8 58.36,131.8 59.54,131.8 60.72,131.8 61.9,131.8 34.8,132.8 35.98,132.8 37.16,132.8 38.34,132.8 39.52,132.8 40.7,132.8 24.117,132.854 25.297,132.854 26.477,132.854 27.657,132.854 28.837,132.854 30.017,132.854 45.4,132.9 46.58,132.9 47.76,132.9 48.94,132.9 50.12,132.9 51.3,132.9 56,132.9 57.18,132.9 58.36,132.9 59.54,132.9 60.72,132.9 61.9,132.9 34.8,133.9 35.98,133.9 37.16,133.9 38.34,133.9 39.52,133.9 40.7,133.9 24.117,133.954 25.297,133.954 26.477,133.954 27.657,133.954 28.837,133.954 30.017,133.954 45.4,134 46.58,134 47.76,134 48.94,134 50.12,134 51.3,134 56,134 57.18,134 58.36,134 59.54,134 60.72,134 61.9,134 34.8,135 35.98,135 37.16,135 38.34,135 39.52,135 40.7,135 24.117,135.054 25.297,135.054 26.477,135.054 27.657,135.054 28.837,135.054 30.017,135.054 45.4,135.1 46.58,135.1 47.76,135.1 48.94,135.1 50.12,135.1 51.3,135.1 56,135.1 57.18,135.1 58.36,135.1 59.54,135.1 60.72,135.1 61.9,135.1 34.8,136.1 35.98,136.1 37.16,136.1 38.34,136.1 39.52,136.1 40.7,136.1 24.117,136.154 25.297,136.154 26.477,136.154 27.657,136.154 28.837,136.154 30.017,136.154 45.4,136.2 46.58,136.2 47.76,136.2 48.94,136.2 50.12,136.2 51.3,136.2 56,136.2 57.18,136.2 58.36,136.2 59.54,136.2 60.72,136.2 61.9,136.2
PHASE_V: J4.6 J32.1 pad.3@37.2,103.614 pad.3@66.5,103.614 Q9.SOURCE Q10.SOURCE Q11.SOURCE Q12.SOURCE Q13.DRAIN Q14.DRAIN Q15.DRAIN Q16.DRAIN R25.2 R26.2 R28.2 R33.2 R35.2 | length 15
  Top Layer w0.5: v1(11.5,98.9) J4.6
  Signal Layer 1 w0.5: v1(11.5,98.9) 14.5,98.9 15.1,99.5 v1(24.1,99.5)
  other v1: 24.1,110.5 25.28,110.5 26.46,110.5 27.64,110.5 28.82,110.5 30,110.5 34.7,110.5 35.88,110.5 37.06,110.5 38.24,110.5 39.42,110.5 40.6,110.5 45.3,110.5 46.48,110.5 47.66,110.5 48.84,110.5 50.02,110.5 51.2,110.5 56,110.5 57.18,110.5 58.36,110.5 59.54,110.5 60.72,110.5 61.9,110.5 24.1,111.6 25.28,111.6 26.46,111.6 27.64,111.6 28.82,111.6 30,111.6 34.7,111.6 35.88,111.6 37.06,111.6 38.24,111.6 39.42,111.6 40.6,111.6 45.3,111.6 46.48,111.6 47.66,111.6 48.84,111.6 50.02,111.6 51.2,111.6 56,111.6 57.18,111.6 58.36,111.6 59.54,111.6 60.72,111.6 61.9,111.6 24.1,112.7 25.28,112.7 26.46,112.7 27.64,112.7 28.82,112.7 30,112.7 34.7,112.7 35.88,112.7 37.06,112.7 38.24,112.7 39.42,112.7 40.6,112.7 45.3,112.7 46.48,112.7 47.66,112.7 48.84,112.7 50.02,112.7 51.2,112.7 56,112.7 57.18,112.7 58.36,112.7 59.54,112.7 60.72,112.7 61.9,112.7 24.1,113.8 25.28,113.8 26.46,113.8 27.64,113.8 28.82,113.8 30,113.8 34.7,113.8 35.88,113.8 37.06,113.8 38.24,113.8 39.42,113.8 40.6,113.8 45.3,113.8 46.48,113.8 47.66,113.8 48.84,113.8 50.02,113.8 51.2,113.8 56,113.8 57.18,113.8 58.36,113.8 59.54,113.8 60.72,113.8 61.9,113.8 24.1,114.9 25.28,114.9 26.46,114.9 27.64,114.9 28.82,114.9 30,114.9 34.7,114.9 35.88,114.9 37.06,114.9 38.24,114.9 39.42,114.9 40.6,114.9 45.3,114.9 46.48,114.9 47.66,114.9 48.84,114.9 50.02,114.9 51.2,114.9 56,114.9 57.18,114.9 58.36,114.9 59.54,114.9 60.72,114.9 61.9,114.9
PHASE_W: J9.6 J33.1 pad.3@37.2,63.8 pad.3@66.5,63.8 Q17.SOURCE Q18.SOURCE Q19.SOURCE Q20.SOURCE Q21.DRAIN Q22.DRAIN Q23.DRAIN Q24.DRAIN R46.2 R47.2 R49.2 R54.2 R56.2 | length 14.6
  Top Layer w0.5: v1(11.5,59.6) J9.6
  Signal Layer 1 w0.5: v1(11.5,59.6) v1(24.9,59.6)
  other v1: 24.1,52.2 25.28,52.2 26.46,52.2 27.64,52.2 28.82,52.2 30,52.2 34.7,52.2 35.88,52.2 37.06,52.2 38.24,52.2 39.42,52.2 40.6,52.2 45.3,52.2 46.48,52.2 47.66,52.2 48.84,52.2 50.02,52.2 51.2,52.2 55.9,52.2 57.08,52.2 58.26,52.2 59.44,52.2 60.62,52.2 61.8,52.2 24.1,53.3 25.28,53.3 26.46,53.3 27.64,53.3 28.82,53.3 30,53.3 34.7,53.3 35.88,53.3 37.06,53.3 38.24,53.3 39.42,53.3 40.6,53.3 45.3,53.3 46.48,53.3 47.66,53.3 48.84,53.3 50.02,53.3 51.2,53.3 55.9,53.3 57.08,53.3 58.26,53.3 59.44,53.3 60.62,53.3 61.8,53.3 24.1,54.4 25.28,54.4 26.46,54.4 27.64,54.4 28.82,54.4 30,54.4 34.7,54.4 35.88,54.4 37.06,54.4 38.24,54.4 39.42,54.4 40.6,54.4 45.3,54.4 46.48,54.4 47.66,54.4 48.84,54.4 50.02,54.4 51.2,54.4 55.9,54.4 57.08,54.4 58.26,54.4 59.44,54.4 60.62,54.4 61.8,54.4 24.1,55.5 25.28,55.5 26.46,55.5 27.64,55.5 28.82,55.5 30,55.5 34.7,55.5 35.88,55.5 37.06,55.5 38.24,55.5 39.42,55.5 40.6,55.5 45.3,55.5 46.48,55.5 47.66,55.5 48.84,55.5 50.02,55.5 51.2,55.5 55.9,55.5 57.08,55.5 58.26,55.5 59.44,55.5 60.62,55.5 61.8,55.5 24.1,56.6 25.28,56.6 26.46,56.6 27.64,56.6 28.82,56.6 30,56.6 34.7,56.6 35.88,56.6 37.06,56.6 38.24,56.6 39.42,56.6 40.6,56.6 45.3,56.6 46.48,56.6 47.66,56.6 48.84,56.6 50.02,56.6 51.2,56.6 55.9,56.6 57.08,56.6 58.26,56.6 59.44,56.6 60.62,56.6 61.8,56.6
PWM_U_HIGH: J1.1 Q1.GATE Q2.GATE Q3.GATE Q4.GATE | length 56.1
  Top Layer w0.75: J1.1 v1(6.3,146.7) ; v1(22.753,149.096) 22.757,149.1 23.995,149.1 Q1.GATE ; v1(33.494,149.071) 33.503,149.081 34.59,149.081 Q2.GATE ; v1(44,149.1) 44.003,149.103 45.226,149.103 Q3.GATE ; v1(54.6,149.1) 54.603,149.103 55.84,149.103 Q4.GATE
  Signal Layer 1 w0.75: v1(6.3,146.7) 6.3,147.9 7.496,149.096 v1(22.753,149.096) 28.106,149.096 28.131,149.071 43.958,149.071 43.986,149.1 v1(54.6,149.1)
PWM_U_LOW: J1.2 Q5.GATE Q6.GATE Q7.GATE Q8.GATE | length 69.4
  Top Layer w0.75: J1.2 v1(11.5,146.7) ; v1(22.8,129.2) Q5.GATE ; v1(33.5,129.2) Q6.GATE ; v1(44.1,129.2) Q7.GATE ; v1(54.771,129.219) 54.78,129.21 55.933,129.21 Q8.GATE
  Signal Layer 1 w0.75: v1(11.5,146.7) 24,146.7 24.9,145.8 24.9,140.1 22.8,138 v1(22.8,129.2) v1(33.5,129.2) v1(44.1,129.2) 54.486,129.2 54.496,129.21 54.761,129.21 v1(54.771,129.219)
PWM_V_HIGH: J4.1 Q9.GATE Q10.GATE Q11.GATE Q12.GATE | length 68
  Top Layer w0.75: J4.1 7.9,106.1 8.7,105.3 v1(8.7,102.4) ; Q12.GATE 30.107,97.508 31.393,97.508 v1(31.4,97.5) ; Q11.GATE 40.707,97.508 41.992,97.508 v1(42,97.5) ; Q10.GATE 51.307,97.508 52.592,97.508 v1(52.6,97.5) ; Q9.GATE 61.907,97.508 63.192,97.508 v1(63.2,97.5)
  Signal Layer 1 w0.75: v1(8.7,102.4) 8.71,102.39 8.71,101.39 9.2,100.9 27.1,100.9 30.5,97.5 v1(31.4,97.5) v1(42,97.5) v1(52.6,97.5) v1(63.2,97.5)
PWM_V_LOW: J4.2 Q13.GATE Q14.GATE Q15.GATE Q16.GATE | length 66.5
  Top Layer w0.75: J4.2 v1(11.5,107.3) ; Q16.GATE 30.103,117.497 31.297,117.497 v1(31.3,117.5) ; Q15.GATE 40.702,117.497 41.997,117.497 v1(42,117.5) ; Q14.GATE 51.302,117.497 52.597,117.497 v1(52.6,117.5) ; Q13.GATE 61.902,117.497 63.197,117.497 v1(63.2,117.5)
  Signal Layer 1 w0.75: v1(11.5,107.3) 11.51,107.31 11.51,107.859 11.541,107.89 11.541,108.141 12.3,108.9 19.2,108.9 20.4,110.1 20.4,116.5 21.4,117.5 v1(31.3,117.5) v1(42,117.5) v1(52.6,117.5) v1(63.2,117.5)
PWM_W_HIGH: J9.1 Q17.GATE Q18.GATE Q19.GATE Q20.GATE | length 56
  Top Layer w0.75: J9.1 v1(6.3,67) ; v1(22.8,69.5) Q17.GATE ; v1(33.4,69.5) Q18.GATE ; v1(44,69.5) Q19.GATE ; v1(54.6,69.5) Q20.GATE
  Signal Layer 1 w0.75: v1(6.3,67) 6.31,67.01 6.31,67.51 8.3,69.5 v1(22.8,69.5) v1(33.4,69.5) v1(44,69.5) v1(54.6,69.5)
PWM_W_LOW: J9.2 Q21.GATE Q22.GATE Q23.GATE Q24.GATE | length 63.5
  Top Layer w0.75: J9.2 11.625,65.715 12.761,65.715 13.2,65.276 v1(13.2,57.4) ; v1(22.7,49.6) Q21.GATE ; v1(33.4,49.6) Q22.GATE ; v1(44,49.6) Q23.GATE ; v1(54.6,49.6) Q24.GATE
  Signal Layer 1 w0.75: v1(13.2,57.4) 13.2,50.9 14.5,49.6 v1(22.7,49.6) v1(33.4,49.6) v1(44,49.6) v1(54.6,49.6)
TEMP_U: B1.2 J1.4 | length 13.8
  Top Layer w0.5: v1(23.4,141.8) B1.2
  Top Layer w0.75: J1.4 11.59,142.81 11.59,141.81 v1(11.6,141.8)
  Signal Layer 1 w0.5: v1(11.6,141.8) v1(23.4,141.8)
TEMP_V: B2.2 J4.4 | length 13.2
  Top Layer w0.5: v1(11.5,102.5) J4.4 ; v1(22.6,102.5) 22.657,102.557 23.082,102.557 23.475,102.95 B2.2
  Signal Layer 1 w0.5: v1(11.5,102.5) v1(22.6,102.5)
TEMP_W: B3.2 J9.4 | length 14.3
  Top Layer w0.5: v1(11.5,62.4) J9.4 ; v1(23.3,60.9) B3.2
  Signal Layer 1 w0.5: v1(11.5,62.4) 21,62.4 22.5,60.9 v1(23.3,60.9)
VIN+: C3.2 C4.2 C5.2 C9.1 C10.1 C11.1 C21.2 C22.2 C23.2 C27.1 C28.1 C29.1 C41.2 C42.2 C43.2 C48.1 C49.1 C50.1 J2.1 J21.1 J21.2 J21.3 J21.4 J21.5 J21.6 pad.3@17.8,92.2 pad.3@17.8,123.05 pad.3@17.8,153.9 pad.3@26.6,164.4 pad.3@46.6,83.7 pad.3@46.6,164.4 Q1.DRAIN Q2.DRAIN Q3.DRAIN Q4.DRAIN Q9.DRAIN Q10.DRAIN Q11.DRAIN Q12.DRAIN Q17.DRAIN Q18.DRAIN Q19.DRAIN Q20.DRAIN
  other v1: 34.724,72.065 35.904,72.065 37.084,72.065 38.264,72.065 39.444,72.065 40.624,72.065 24.1,72.1 25.28,72.1 26.46,72.1 27.64,72.1 28.82,72.1 30,72.1 45.3,72.1 46.48,72.1 47.66,72.1 48.84,72.1 50.02,72.1 51.2,72.1 55.916,72.105 57.096,72.105 58.276,72.105 59.456,72.105 60.636,72.105 61.816,72.105 34.724,73.165 35.904,73.165 37.084,73.165 38.264,73.165 39.444,73.165 40.624,73.165 24.1,73.2 25.28,73.2 26.46,73.2 27.64,73.2 28.82,73.2 30,73.2 45.3,73.2 46.48,73.2 47.66,73.2 48.84,73.2 50.02,73.2 51.2,73.2 55.916,73.205 57.096,73.205 58.276,73.205 59.456,73.205 60.636,73.205 61.816,73.205 34.724,74.265 35.904,74.265 37.084,74.265 38.264,74.265 39.444,74.265 40.624,74.265 24.1,74.3 25.28,74.3 26.46,74.3 27.64,74.3 28.82,74.3 30,74.3 45.3,74.3 46.48,74.3 47.66,74.3 48.84,74.3 50.02,74.3 51.2,74.3 55.916,74.305 57.096,74.305 58.276,74.305 59.456,74.305 60.636,74.305 61.816,74.305 34.724,75.365 35.904,75.365 37.084,75.365 38.264,75.365 39.444,75.365 40.624,75.365 24.1,75.4 25.28,75.4 26.46,75.4 27.64,75.4 28.82,75.4 30,75.4 45.3,75.4 46.48,75.4 47.66,75.4 48.84,75.4 50.02,75.4 51.2,75.4 55.916,75.405 57.096,75.405 58.276,75.405 59.456,75.405 60.636,75.405 61.816,75.405 34.724,76.465 35.904,76.465 37.084,76.465 38.264,76.465 39.444,76.465 40.624,76.465 24.1,76.5 25.28,76.5 26.46,76.5 27.64,76.5 28.82,76.5 30,76.5 45.3,76.5 46.48,76.5 47.66,76.5 48.84,76.5 50.02,76.5 51.2,76.5 55.916,76.505 57.096,76.505 58.276,76.505 59.456,76.505 60.636,76.505 61.816,76.505 24.1,90.5 25.28,90.5 26.46,90.5 27.64,90.5 28.82,90.5 30,90.5 34.7,90.5 35.88,90.5 37.06,90.5 38.24,90.5 39.42,90.5 40.6,90.5 45.3,90.5 46.48,90.5 47.66,90.5 48.84,90.5 50.02,90.5 51.2,90.5 56,90.5 57.18,90.5 58.36,90.5 59.54,90.5 60.72,90.5 61.9,90.5 24.1,91.6 25.28,91.6 26.46,91.6 27.64,91.6 28.82,91.6 30,91.6 34.7,91.6 35.88,91.6 37.06,91.6 38.24,91.6 39.42,91.6 40.6,91.6 45.3,91.6 46.48,91.6 47.66,91.6 48.84,91.6 50.02,91.6 51.2,91.6 56,91.6 57.18,91.6 58.36,91.6 59.54,91.6 60.72,91.6 61.9,91.6 24.1,92.7 25.28,92.7 26.46,92.7 27.64,92.7 28.82,92.7 30,92.7 34.7,92.7 35.88,92.7 37.06,92.7 38.24,92.7 39.42,92.7 40.6,92.7 45.3,92.7 46.48,92.7 47.66,92.7 48.84,92.7 50.02,92.7 51.2,92.7 56,92.7 57.18,92.7 58.36,92.7 59.54,92.7 60.72,92.7 61.9,92.7 24.1,93.8 25.28,93.8 26.46,93.8 27.64,93.8 28.82,93.8 30,93.8 34.7,93.8 35.88,93.8 37.06,93.8 38.24,93.8 39.42,93.8 40.6,93.8 45.3,93.8 46.48,93.8 47.66,93.8 48.84,93.8 50.02,93.8 51.2,93.8 56,93.8 57.18,93.8 58.36,93.8 59.54,93.8 60.72,93.8 61.9,93.8 24.1,94.9 25.28,94.9 26.46,94.9 27.64,94.9 28.82,94.9 30,94.9 34.7,94.9 35.88,94.9 37.06,94.9 38.24,94.9 39.42,94.9 40.6,94.9 45.3,94.9 46.48,94.9 47.66,94.9 48.84,94.9 50.02,94.9 51.2,94.9 56,94.9 57.18,94.9 58.36,94.9 59.54,94.9 60.72,94.9 61.9,94.9 24.052,151.608 25.232,151.608 26.412,151.608 27.592,151.608 28.772,151.608 29.952,151.608 34.7,151.7 35.88,151.7 37.06,151.7 38.24,151.7 39.42,151.7 40.6,151.7 45.3,151.7 46.48,151.7 47.66,151.7 48.84,151.7 50.02,151.7 51.2,151.7 55.9,151.8 57.08,151.8 58.26,151.8 59.44,151.8 60.62,151.8 61.8,151.8 24.052,152.708 25.232,152.708 26.412,152.708 27.592,152.708 28.772,152.708 29.952,152.708 34.7,152.8 35.88,152.8 37.06,152.8 38.24,152.8 39.42,152.8 40.6,152.8 45.3,152.8 46.48,152.8 47.66,152.8 48.84,152.8 50.02,152.8 51.2,152.8 55.9,152.9 57.08,152.9 58.26,152.9 59.44,152.9 60.62,152.9 61.8,152.9 24.052,153.808 25.232,153.808 26.412,153.808 27.592,153.808 28.772,153.808 29.952,153.808 34.7,153.9 35.88,153.9 37.06,153.9 38.24,153.9 39.42,153.9 40.6,153.9 45.3,153.9 46.48,153.9 47.66,153.9 48.84,153.9 50.02,153.9 51.2,153.9 55.9,154 57.08,154 58.26,154 59.44,154 60.62,154 61.8,154 24.052,154.908 25.232,154.908 26.412,154.908 27.592,154.908 28.772,154.908 29.952,154.908 34.7,155 35.88,155 37.06,155 38.24,155 39.42,155 40.6,155 45.3,155 46.48,155 47.66,155 48.84,155 50.02,155 51.2,155 55.9,155.1 57.08,155.1 58.26,155.1 59.44,155.1 60.62,155.1 61.8,155.1 24.052,156.008 25.232,156.008 26.412,156.008 27.592,156.008 28.772,156.008 29.952,156.008 34.7,156.1 35.88,156.1 37.06,156.1 38.24,156.1 39.42,156.1 40.6,156.1 45.3,156.1 46.48,156.1 47.66,156.1 48.84,156.1 50.02,156.1 51.2,156.1 55.9,156.2 57.08,156.2 58.26,156.2 59.44,156.2 60.62,156.2 61.8,156.2

## Polygon pours and split planes (outlines as drawn)
VIN+ on Top Layer "VIN+_L01_P000" (solid, remove dead copper, pour order 0): 62.5,150.8 62.5,158 63.7,159.2 91.4,159.2 93.5,157.1 93.5,146.4 101.9,146.4 102,146.3 102,157.8 100.7,159.1 95.6,159.1 92.5,162.2 92.5,169.8 92.4,169.9 14.2,169.9 14,169.7 14,151.1 14.3,150.8
VIN+ on Top Layer "VIN+_L01_P001" (solid, remove dead copper, pour order 1): 63,71.2 14,71.2 14,85.9 15.2,87.1 63.344,87.1 64.3,86.144 64.3,80.935 63,79.635
VIN+ on Top Layer "VIN+_L01_P002" (solid, remove dead copper, pour order 2): 21.1,95.8 63,95.8 63,86.9 62.9,86.8 20.9,86.8
VIN+ on Top Layer "VIN+_L01_P015" (solid, remove dead copper, pour order 15): 14,159.6 12.4,158 10.4,158 10.4,149.5 14.4,149.5 14.4,152.1 15.4,153.1
VIN+ on Top Layer "VIN+_L01_P016" (solid, remove dead copper, pour order 16): 14.8,136.6 10.4,136.6 10.4,110 14.8,110
VIN+ on Top Layer "VIN+_L01_P017" (solid, remove dead copper, pour order 17): 14.5,96.5 10.4,96.5 10.4,70.1 14.2,70.1 15.4,71.3
VIN+ on Top Layer "VIN+_L01_P018" (solid, remove dead copper, pour order 18): 10.4,57.2 10.4,49.4 21.6,49.4 21.7,49.5 21.7,71.5 21.8,71.6 21.7,71.7 14.7,71.7 14.7,71 14.2,70.5 14.2,56.1 12.3,56.1 12.3,57.2
GND on Top Layer "GND_L01_P019" (solid, remove dead copper, pour order 19): 3.6,169.9 3.6,36.1 103.4,36.1 103.4,169.9
OUT_W on Top Layer "OUT_W_L01_P014" (solid, remove dead copper, pour order 14): 79,79 92,79 92,48.5 79.047,48.5 79.03,48.482
OUT_V on Top Layer "OUT_V_L01_P013" (solid, remove dead copper, pour order 13): 79.2,118.7 92,118.7 92,88.5 79.137,88.5 79.128,88.509 79.105,88.509
OUT_U on Top Layer "OUT_U_L01_P012" (solid, remove dead copper, pour order 12): 79.1,158.3 90.5,158.3 91.8,157 91.8,128.3 79.1,128.3
PHASE_U on Top Layer "PHASE_U_L01_P011" (solid, remove dead copper, pour order 11): 67.5,158.3 74.1,158.3 74.1,128.2 65.1,128.2 64.3,129 64.3,130.563 63.9,130.963 63.9,149.5 65,150.6 65,151.2
PHASE_V on Top Layer "PHASE_V_L01_P010" (solid, remove dead copper, pour order 10): 68.6,118.7 74.1,118.7 74.1,88.5 68.6,88.5
PHASE_W on Top Layer "PHASE_W_L01_P009" (solid, remove dead copper, pour order 9): 25.4,70.2 31.1,70.2 31.1,67.5 36,67.5 36,70.2 41.7,70.2 41.7,67.5 46.6,67.5 46.6,70.2 52.3,70.2 52.3,67.5 57.2,67.5 57.2,70.2 62.9,70.2 62.912,70.188 63.888,70.188 64.3,70.6 64.3,78.2 65.1,79 74,79 74,48.5 65.042,48.5 64,49.542 64,59.4 64,51.3 23.4,51.3 23.4,58.7 25.4,60.7 25.4,64.9
PHASE_V on Top Layer "PHASE_V_L01_P008" (solid, remove dead copper, pour order 8): 56.817,115.7 63.6,115.7 64.2,116.3 64.2,118.1 64.8,118.7 68.6,118.7 69.4,117.9 69.4,89.3 68.6,88.5 65,88.5 64.2,89.3 64.2,99 63.2,100 60.6,100 60.6,96.8 54.9,96.8 54.9,100.1 50,100.1 50,96.8 44.6,96.8 44.6,100 39.4,100 39.4,96.8 34,96.8 34,100 28.9,100 28.9,96.8 23.4,96.8 23.4,100.3 25.1,102 25.1,106.1 23.4,107.8 23.4,115.8 63.6,115.7
PHASE_U on Top Layer "PHASE_U_L01_P007" (solid, remove dead copper, pour order 7): 23.4,131 64.6,131 64.8,131.2 64.8,140.2 28.1,140.2 27,141.3 25.9,141.3 23.4,138.8 23.4,137.9
PHASE_U on Top Layer "PHASE_U_L01_P006" (solid, remove dead copper, pour order 6): 25.3,149.9 31,149.9 31,146.6 29.6,145.2 26,145.2 25.3,145.9 25.3,147
PHASE_U on Top Layer "PHASE_U_L01_P005" (solid, remove dead copper, pour order 5): 35.9,149.9 41.6,149.9 41.6,146.6 41.4,146.4 35.9,146.4
PHASE_U on Top Layer "PHASE_U_L01_P004" (solid, remove dead copper, pour order 4): 46.6,149.9 46.6,146.5 46.8,146.3 52,146.3 52,149.9
PHASE_U on Top Layer "PHASE_U_L01_P003" (solid, remove dead copper, pour order 3): 57.2,150 57.2,146.5 64.8,146.5 65.1,146.2 65.2,146.3 65.2,150
GND on Bottom Layer "GND_L04_P020" (solid, remove dead copper, pour order 20): 3.6,169.9 3.6,36.1 103.4,36.1 103.4,169.9

## Keep-outs
Keep-Out Layer:
  the board outline again, w0.254

## Silkscreen, mask and mechanical layers (free items; w line width, h text height)
Top Paste:
  lines w0.254: 54.9,164.6 66.1,164.6 66.2,164.5 ; 58.544,169.312 58.544,159.312 58.556,159.3 ; 58.6,36.6 58.6,46.6 ; 82.727,143.428 92.727,143.428 ; 82.75,63.8 92.75,63.8 ; 82.75,103.614 92.75,103.614 ; 87.727,98.614 87.727,108.614 ; 87.75,58.8 87.75,68.8 ; 87.75,138.428 87.75,148.428

## Dimensions
3.6,36.1 to 103.4,36.1 on Top Overlay
103.4,169.9 to 103.4,36.1 on Top Overlay
62.5,68.8 to 62.6,48.9 on Top Paste
62.5,88.7 to 62.6,68.8 on Top Paste
62.5,108.6 to 62.6,88.7 on Top Paste
62.5,128.5 to 62.6,108.6 on Top Paste
62.5,148.4 to 62.6,128.5 on Top Paste

## Text inside footprints (layer, text, board x,y; h text height)
J2: Top Assembly "1" at 5.572,90.001 h1.52
J5: Top Assembly "1" at 103.602,202.61 h1.52 r180
J6: Top Assembly "1" at 103.602,162.796 h1.52 r180
J7: Top Assembly "1" at 103.575,122.982 h1.52 r180
J31: Top Assembly "1" at 31.534,84.69 h1.52; Top Assembly "1" at 35.408,109.201 h1.52
J32: Top Assembly "1" at 35.408,69.515 h1.52; Top Assembly "1" at 31.534,45.004 h1.52